# EAGLE board Pro-Mini-Candy-GiantPanel (EAGLE 6.5.0), part 1 of 13
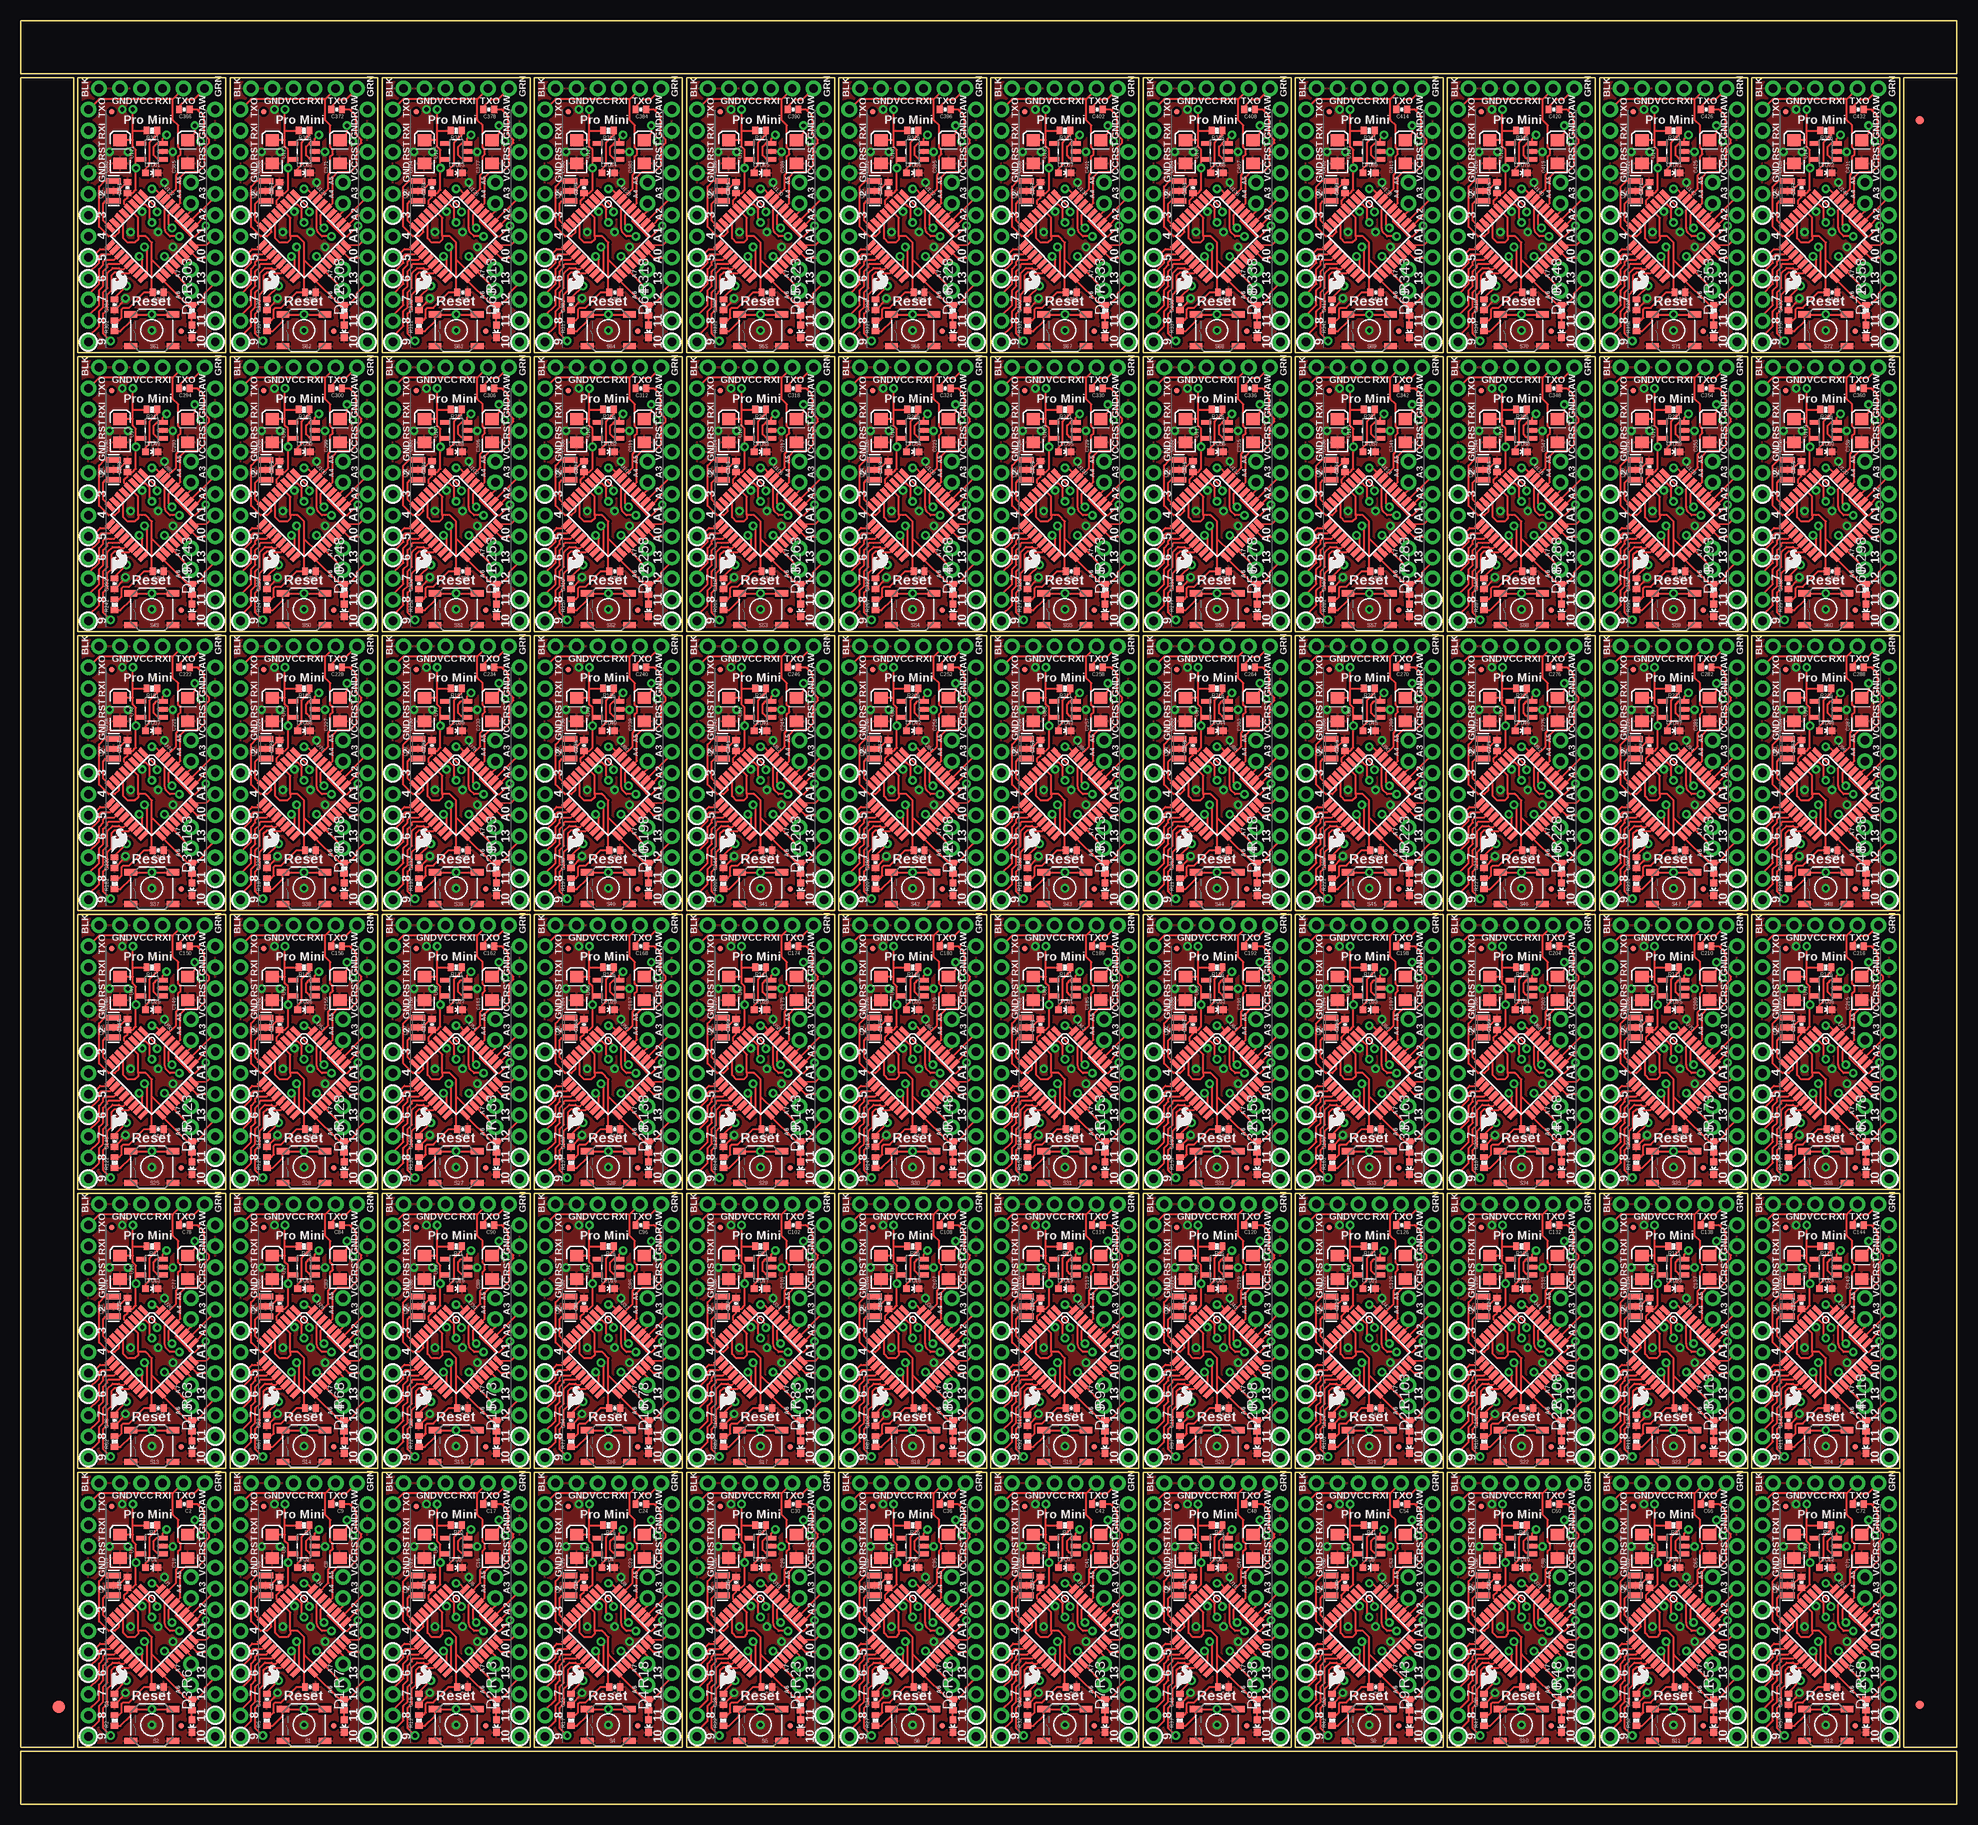
[diagram p0: board, top side]
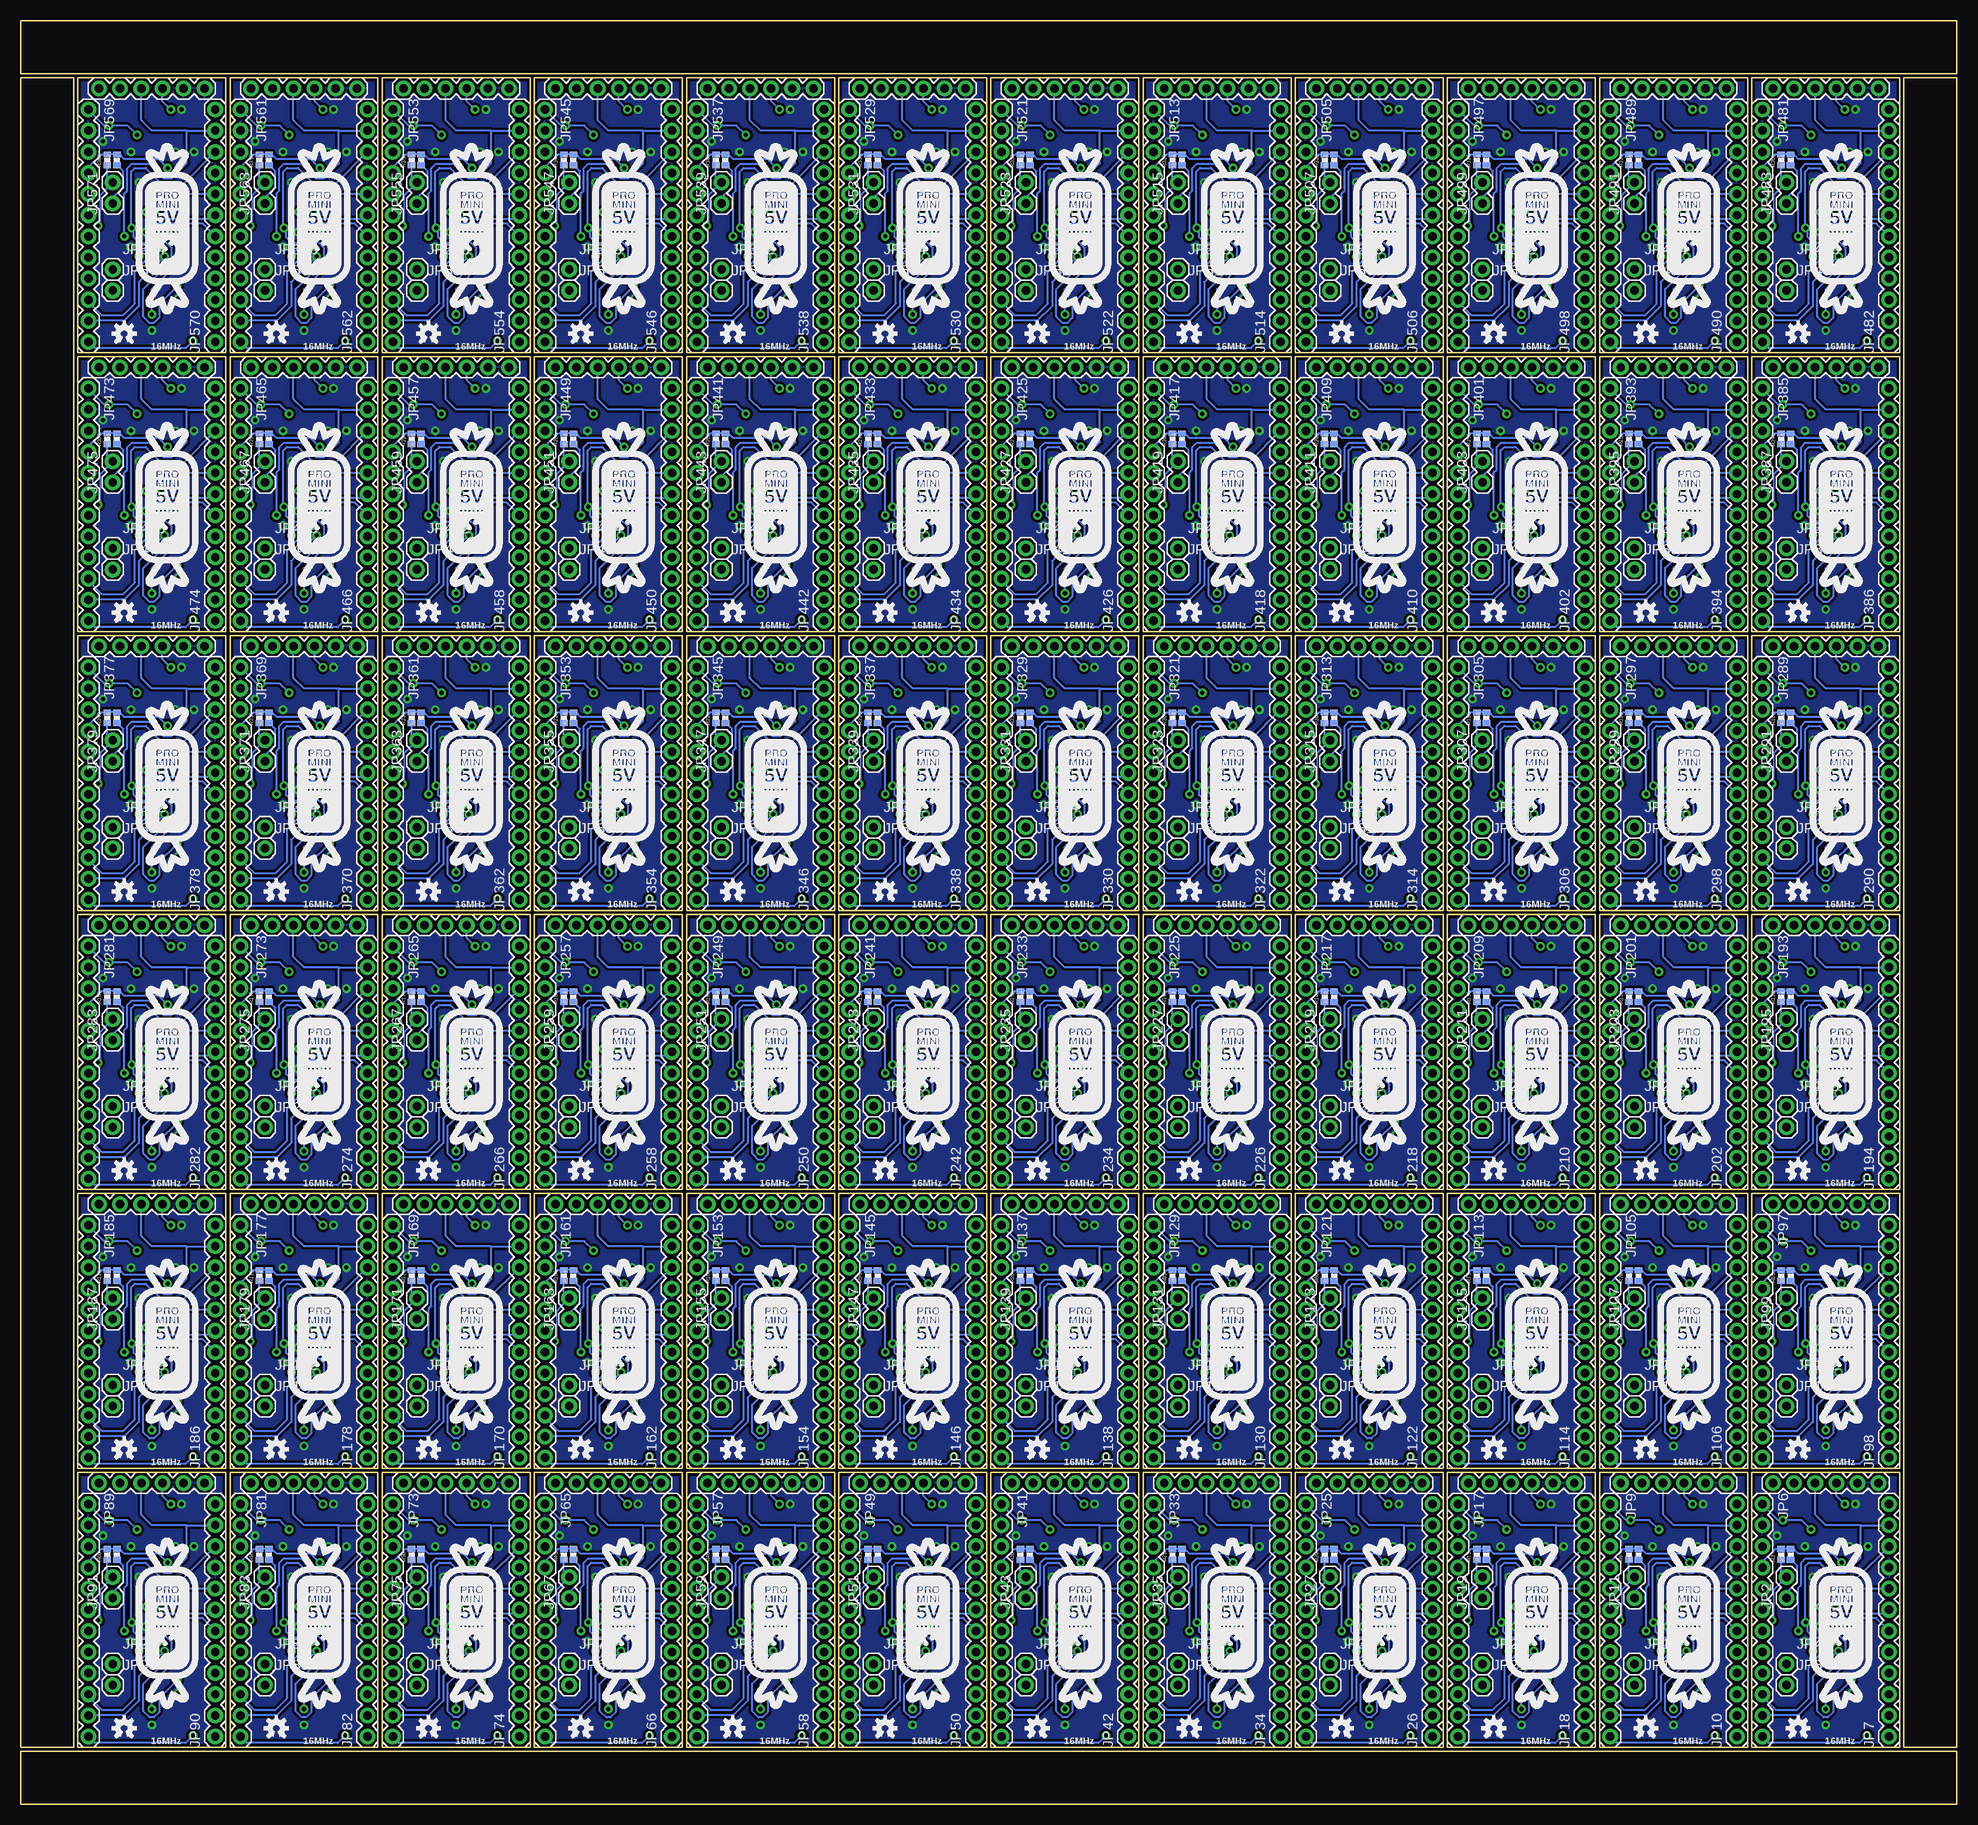
[diagram p1: board, bottom side, seen from below]

Size 232.66 x 214.38 mm. Coordinates in mm from the lower left corner, seen from the top.
Outline: 304 segments
Copper layers (1*16): Top 0.035mm / dielectric 1.5mm / Bottom 0.035mm
Design rules "default": minimum track width 8mil, minimum drill 20mil, track to track 8mil, track to pad 8mil, pad to pad 8mil, via to via 8mil, smd to smd 8mil, copper to edge 8mil, drill to drill 8mil, minimum pad ring 12mil, minimum via ring 10mil, stop-mask expansion 4mil, vias tented up to drill 20mil, thermal gap 10mil
Net classes: 0 default: width 0.203 mm; 1 vcc: width 0.254 mm

## Footprints (pad centres in the part's own frame; a part is rotated, then mirrored left to right if it is on the bottom)
0402-CAP = smd 0.7 x 0.9: 1 -0.65,0; 2 0.65,0
EIA3216 = smd 1.4 x 1.6: A 1.4,0; C -1.4,0
LED-0603 = smd 0.8 x 0.8: A 0,-0.75; C 0,0.75
FIDUCIAL-1.5X3 = smd 1.5 x 1.5: 1 0,0
FIDUCIAL-1X2 = smd 1 x 1: 1 0,0
1X06 = drill 1.016 pad 1.88: 1 0,0; 2 2.54,0; 3 5.08,0; 4 7.62,0; 5 10.16,0; 6 12.7,0
1X02 = drill 1.016 pad 1.88: 1 0,0; 2 2.54,0
1X01 = drill 1.016 pad 1.88: 1 0,0
MICRO-FIDUCIAL = smd 0.635 x 0.635: 1 0,0
1X12 = drill 1.016 pad 1.88: 1 0,0; 2 2.54,0; 3 5.08,0; 4 7.62,0; 5 10.16,0; 6 12.7,0; 7 15.24,0; 8 17.78,0; 9 20.32,0; 10 22.86,0; 11 25.4,0; 12 27.94,0
RESONATOR-SMD = smd 0.7 x 1.7: 1 -1.2,0; 2 0,0; 3 1.2,0
0402-RES = smd 0.7 x 0.9: 1 -0.65,0; 2 0.65,0
TACTILE_SWITCH_SMD = smd 1.524 x 0.762: 1 -2.54,1.905; 2 2.54,1.905; 3 -2.54,-1.905; 4 2.54,-1.905
TQFP32-08 = smd 1.27 x 0.559: 1 -4.293,2.8; 2 -4.293,2; 3 -4.293,1.2; 4 -4.293,0.4; 5 -4.293,-0.4; 6 -4.293,-1.2; 7 -4.293,-2; 8 -4.293,-2.8; 17 4.293,-2.8; 18 4.293,-2; 19 4.293,-1.2; 20 4.293,-0.4; 21 4.293,0.4; 22 4.293,1.2; 23 4.293,2; 24 4.293,2.8 | smd 0.559 x 1.27: 9 -2.8,-4.293; 10 -2,-4.293; 11 -1.2,-4.293; 12 -0.4,-4.293; 13 0.4,-4.293; 14 1.2,-4.293; 15 2,-4.293; 16 2.8,-4.293; 25 2.8,4.293; 26 2,4.293; 27 1.2,4.293; 28 0.4,4.293; 29 -0.4,4.293; 30 -1.2,4.293; 31 -2,4.293; 32 -2.8,4.293
SOT23-5 = smd 0.55 x 1.2: 1 -0.95,-1.3; 2 0,-1.3; 3 0.95,-1.3; 4 0.95,1.3; 5 -0.95,1.3

## Placement (x,y rotation side)
C1  0.1uF  [0402-CAP]  11.28,12.6 90 top
C2  0.1uF  [0402-CAP]  19.66,36.07 180 top
C3  0.1uF  [0402-CAP]  16.51,14.1 180 top
C4  0.1uF  [0402-CAP]  31.11,26.67 90 top
C5  10uF  [EIA3216]  30.23,30.99 90 top
C6  0.1uF  [0402-CAP]  34.8,14.1 180 top
C7  0.1uF  [0402-CAP]  29.57,12.6 90 top
C8  10uF  [EIA3216]  38.35,30.99 90 top
C9  0.1uF  [0402-CAP]  37.95,36.07 180 top
C10  0.1uF  [0402-CAP]  12.83,26.67 90 top
C11  0.1uF  [0402-CAP]  49.4,26.67 90 top
C12  10uF  [EIA3216]  48.51,30.99 90 top
C13  10uF  [EIA3216]  11.94,30.99 90 top
C14  0.1uF  [0402-CAP]  53.09,14.1 180 top
C15  0.1uF  [0402-CAP]  47.85,12.6 90 top
C16  10uF  [EIA3216]  56.64,30.99 90 top
C17  0.1uF  [0402-CAP]  56.24,36.07 180 top
C18  0.1uF  [0402-CAP]  67.69,26.67 90 top
C19  10uF  [EIA3216]  20.07,30.99 90 top
C20  10uF  [EIA3216]  66.8,30.99 90 top
C21  0.1uF  [0402-CAP]  71.37,14.1 180 top
C22  0.1uF  [0402-CAP]  66.14,12.6 90 top
C23  10uF  [EIA3216]  74.93,30.99 90 top
C24  0.1uF  [0402-CAP]  74.52,36.07 180 top
C25  0.1uF  [0402-CAP]  85.98,26.67 90 top
C26  10uF  [EIA3216]  85.09,30.99 90 top
C27  0.1uF  [0402-CAP]  89.66,14.1 180 top
C28  0.1uF  [0402-CAP]  84.43,12.6 90 top
C29  10uF  [EIA3216]  93.22,30.99 90 top
C30  0.1uF  [0402-CAP]  92.81,36.07 180 top
C31  0.1uF  [0402-CAP]  104.27,26.67 90 top
C32  10uF  [EIA3216]  103.38,30.99 90 top
C33  0.1uF  [0402-CAP]  107.95,14.1 180 top
C34  0.1uF  [0402-CAP]  102.72,12.6 90 top
C35  10uF  [EIA3216]  111.51,30.99 90 top
C36  0.1uF  [0402-CAP]  111.1,36.07 180 top
C37  0.1uF  [0402-CAP]  122.56,26.67 90 top
C38  10uF  [EIA3216]  121.67,30.99 90 top
C39  0.1uF  [0402-CAP]  126.24,14.1 180 top
C40  0.1uF  [0402-CAP]  121.01,12.6 90 top
C41  10uF  [EIA3216]  129.79,30.99 90 top
C42  0.1uF  [0402-CAP]  129.39,36.07 180 top
C43  0.1uF  [0402-CAP]  140.84,26.67 90 top
C44  10uF  [EIA3216]  139.95,30.99 90 top
C45  0.1uF  [0402-CAP]  144.53,14.1 180 top
C46  0.1uF  [0402-CAP]  139.29,12.6 90 top
C47  10uF  [EIA3216]  148.08,30.99 90 top
C48  0.1uF  [0402-CAP]  147.68,36.07 180 top
C49  0.1uF  [0402-CAP]  159.13,26.67 90 top
C50  10uF  [EIA3216]  158.24,30.99 90 top
C51  0.1uF  [0402-CAP]  162.81,14.1 180 top
C52  0.1uF  [0402-CAP]  157.58,12.6 90 top
C53  10uF  [EIA3216]  166.37,30.99 90 top
C54  0.1uF  [0402-CAP]  165.96,36.07 180 top
C55  0.1uF  [0402-CAP]  177.42,26.67 90 top
C56  10uF  [EIA3216]  176.53,30.99 90 top
C57  0.1uF  [0402-CAP]  181.1,14.1 180 top
C58  0.1uF  [0402-CAP]  175.87,12.6 90 top
C59  10uF  [EIA3216]  184.66,30.99 90 top
C60  0.1uF  [0402-CAP]  184.25,36.07 180 top
C61  0.1uF  [0402-CAP]  195.71,26.67 90 top
C62  10uF  [EIA3216]  194.82,30.99 90 top
C63  0.1uF  [0402-CAP]  199.39,14.1 180 top
C64  0.1uF  [0402-CAP]  194.16,12.6 90 top
C65  10uF  [EIA3216]  202.95,30.99 90 top
C66  0.1uF  [0402-CAP]  202.54,36.07 180 top
C67  0.1uF  [0402-CAP]  214,26.67 90 top
C68  10uF  [EIA3216]  213.11,30.99 90 top
C69  0.1uF  [0402-CAP]  217.68,14.1 180 top
C70  0.1uF  [0402-CAP]  212.45,12.6 90 top
C71  10uF  [EIA3216]  221.23,30.99 90 top
C72  0.1uF  [0402-CAP]  220.83,36.07 180 top
C73  0.1uF  [0402-CAP]  12.83,60.2 90 top
C74  10uF  [EIA3216]  11.94,64.52 90 top
C75  0.1uF  [0402-CAP]  16.51,47.62 180 top
C76  0.1uF  [0402-CAP]  11.28,46.13 90 top
C77  10uF  [EIA3216]  20.07,64.52 90 top
C78  0.1uF  [0402-CAP]  19.66,69.6 180 top
C79  0.1uF  [0402-CAP]  31.11,60.2 90 top
C80  10uF  [EIA3216]  30.23,64.52 90 top
C81  0.1uF  [0402-CAP]  34.8,47.62 180 top
C82  0.1uF  [0402-CAP]  29.57,46.13 90 top
C83  10uF  [EIA3216]  38.35,64.52 90 top
C84  0.1uF  [0402-CAP]  37.95,69.6 180 top
C85  0.1uF  [0402-CAP]  49.4,60.2 90 top
C86  10uF  [EIA3216]  48.51,64.52 90 top
C87  0.1uF  [0402-CAP]  53.09,47.62 180 top
C88  0.1uF  [0402-CAP]  47.85,46.13 90 top
C89  10uF  [EIA3216]  56.64,64.52 90 top
C90  0.1uF  [0402-CAP]  56.24,69.6 180 top
C91  0.1uF  [0402-CAP]  67.69,60.2 90 top
C92  10uF  [EIA3216]  66.8,64.52 90 top
C93  0.1uF  [0402-CAP]  71.37,47.62 180 top
C94  0.1uF  [0402-CAP]  66.14,46.13 90 top
C95  10uF  [EIA3216]  74.93,64.52 90 top
C96  0.1uF  [0402-CAP]  74.52,69.6 180 top
C97  0.1uF  [0402-CAP]  85.98,60.2 90 top
C98  10uF  [EIA3216]  85.09,64.52 90 top
C99  0.1uF  [0402-CAP]  89.66,47.62 180 top
C100  0.1uF  [0402-CAP]  84.43,46.13 90 top
C101  10uF  [EIA3216]  93.22,64.52 90 top
C102  0.1uF  [0402-CAP]  92.81,69.6 180 top
C103  0.1uF  [0402-CAP]  104.27,60.2 90 top
C104  10uF  [EIA3216]  103.38,64.52 90 top
C105  0.1uF  [0402-CAP]  107.95,47.62 180 top
C106  0.1uF  [0402-CAP]  102.72,46.13 90 top
C107  10uF  [EIA3216]  111.51,64.52 90 top
C108  0.1uF  [0402-CAP]  111.1,69.6 180 top
C109  0.1uF  [0402-CAP]  122.56,60.2 90 top
C110  10uF  [EIA3216]  121.67,64.52 90 top
C111  0.1uF  [0402-CAP]  126.24,47.62 180 top
C112  0.1uF  [0402-CAP]  121.01,46.13 90 top
C113  10uF  [EIA3216]  129.79,64.52 90 top
C114  0.1uF  [0402-CAP]  129.39,69.6 180 top
C115  0.1uF  [0402-CAP]  140.84,60.2 90 top
C116  10uF  [EIA3216]  139.95,64.52 90 top
C117  0.1uF  [0402-CAP]  144.53,47.62 180 top
C118  0.1uF  [0402-CAP]  139.29,46.13 90 top
C119  10uF  [EIA3216]  148.08,64.52 90 top
C120  0.1uF  [0402-CAP]  147.68,69.6 180 top
C121  0.1uF  [0402-CAP]  159.13,60.2 90 top
C122  10uF  [EIA3216]  158.24,64.52 90 top
C123  0.1uF  [0402-CAP]  162.81,47.62 180 top
C124  0.1uF  [0402-CAP]  157.58,46.13 90 top
C125  10uF  [EIA3216]  166.37,64.52 90 top
C126  0.1uF  [0402-CAP]  165.96,69.6 180 top
C127  0.1uF  [0402-CAP]  177.42,60.2 90 top
C128  10uF  [EIA3216]  176.53,64.52 90 top
C129  0.1uF  [0402-CAP]  181.1,47.62 180 top
C130  0.1uF  [0402-CAP]  175.87,46.13 90 top
C131  10uF  [EIA3216]  184.66,64.52 90 top
C132  0.1uF  [0402-CAP]  184.25,69.6 180 top
C133  0.1uF  [0402-CAP]  195.71,60.2 90 top
C134  10uF  [EIA3216]  194.82,64.52 90 top
C135  0.1uF  [0402-CAP]  199.39,47.62 180 top
C136  0.1uF  [0402-CAP]  194.16,46.13 90 top
C137  10uF  [EIA3216]  202.95,64.52 90 top
C138  0.1uF  [0402-CAP]  202.54,69.6 180 top
C139  0.1uF  [0402-CAP]  214,60.2 90 top
C140  10uF  [EIA3216]  213.11,64.52 90 top
C141  0.1uF  [0402-CAP]  217.68,47.62 180 top
C142  0.1uF  [0402-CAP]  212.45,46.13 90 top
C143  10uF  [EIA3216]  221.23,64.52 90 top
C144  0.1uF  [0402-CAP]  220.83,69.6 180 top
C145  0.1uF  [0402-CAP]  12.83,93.73 90 top
C146  10uF  [EIA3216]  11.94,98.04 90 top
C147  0.1uF  [0402-CAP]  16.51,81.15 180 top
C148  0.1uF  [0402-CAP]  11.28,79.65 90 top
C149  10uF  [EIA3216]  20.07,98.04 90 top
C150  0.1uF  [0402-CAP]  19.66,103.12 180 top
C151  0.1uF  [0402-CAP]  31.11,93.73 90 top
C152  10uF  [EIA3216]  30.23,98.04 90 top
C153  0.1uF  [0402-CAP]  34.8,81.15 180 top
C154  0.1uF  [0402-CAP]  29.57,79.65 90 top
C155  10uF  [EIA3216]  38.35,98.04 90 top
C156  0.1uF  [0402-CAP]  37.95,103.12 180 top
C157  0.1uF  [0402-CAP]  49.4,93.73 90 top
C158  10uF  [EIA3216]  48.51,98.04 90 top
C159  0.1uF  [0402-CAP]  53.09,81.15 180 top
C160  0.1uF  [0402-CAP]  47.85,79.65 90 top
C161  10uF  [EIA3216]  56.64,98.04 90 top
C162  0.1uF  [0402-CAP]  56.24,103.12 180 top
C163  0.1uF  [0402-CAP]  67.69,93.73 90 top
C164  10uF  [EIA3216]  66.8,98.04 90 top
C165  0.1uF  [0402-CAP]  71.37,81.15 180 top
C166  0.1uF  [0402-CAP]  66.14,79.65 90 top
C167  10uF  [EIA3216]  74.93,98.04 90 top
C168  0.1uF  [0402-CAP]  74.52,103.12 180 top
C169  0.1uF  [0402-CAP]  85.98,93.73 90 top
C170  10uF  [EIA3216]  85.09,98.04 90 top
C171  0.1uF  [0402-CAP]  89.66,81.15 180 top
C172  0.1uF  [0402-CAP]  84.43,79.65 90 top
C173  10uF  [EIA3216]  93.22,98.04 90 top
C174  0.1uF  [0402-CAP]  92.81,103.12 180 top
C175  0.1uF  [0402-CAP]  104.27,93.73 90 top
C176  10uF  [EIA3216]  103.38,98.04 90 top
C177  0.1uF  [0402-CAP]  107.95,81.15 180 top
C178  0.1uF  [0402-CAP]  102.72,79.65 90 top
C179  10uF  [EIA3216]  111.51,98.04 90 top
C180  0.1uF  [0402-CAP]  111.1,103.12 180 top
C181  0.1uF  [0402-CAP]  122.56,93.73 90 top
C182  10uF  [EIA3216]  121.67,98.04 90 top
C183  0.1uF  [0402-CAP]  126.24,81.15 180 top
C184  0.1uF  [0402-CAP]  121.01,79.65 90 top
C185  10uF  [EIA3216]  129.79,98.04 90 top
C186  0.1uF  [0402-CAP]  129.39,103.12 180 top
C187  0.1uF  [0402-CAP]  140.84,93.73 90 top
C188  10uF  [EIA3216]  139.95,98.04 90 top
C189  0.1uF  [0402-CAP]  144.53,81.15 180 top
C190  0.1uF  [0402-CAP]  139.29,79.65 90 top
C191  10uF  [EIA3216]  148.08,98.04 90 top
C192  0.1uF  [0402-CAP]  147.68,103.12 180 top
C193  0.1uF  [0402-CAP]  159.13,93.73 90 top
C194  10uF  [EIA3216]  158.24,98.04 90 top
C195  0.1uF  [0402-CAP]  162.81,81.15 180 top
C196  0.1uF  [0402-CAP]  157.58,79.65 90 top
C197  10uF  [EIA3216]  166.37,98.04 90 top
C198  0.1uF  [0402-CAP]  165.96,103.12 180 top
C199  0.1uF  [0402-CAP]  177.42,93.73 90 top
C200  10uF  [EIA3216]  176.53,98.04 90 top
C201  0.1uF  [0402-CAP]  181.1,81.15 180 top
C202  0.1uF  [0402-CAP]  175.87,79.65 90 top
C203  10uF  [EIA3216]  184.66,98.04 90 top
C204  0.1uF  [0402-CAP]  184.25,103.12 180 top
C205  0.1uF  [0402-CAP]  195.71,93.73 90 top
C206  10uF  [EIA3216]  194.82,98.04 90 top
C207  0.1uF  [0402-CAP]  199.39,81.15 180 top
C208  0.1uF  [0402-CAP]  194.16,79.65 90 top
C209  10uF  [EIA3216]  202.95,98.04 90 top
C210  0.1uF  [0402-CAP]  202.54,103.12 180 top
C211  0.1uF  [0402-CAP]  214,93.73 90 top
C212  10uF  [EIA3216]  213.11,98.04 90 top
C213  0.1uF  [0402-CAP]  217.68,81.15 180 top
C214  0.1uF  [0402-CAP]  212.45,79.65 90 top
C215  10uF  [EIA3216]  221.23,98.04 90 top
C216  0.1uF  [0402-CAP]  220.83,103.12 180 top
C217  0.1uF  [0402-CAP]  12.83,127.25 90 top
C218  10uF  [EIA3216]  11.94,131.57 90 top
C219  0.1uF  [0402-CAP]  16.51,114.68 180 top
C220  0.1uF  [0402-CAP]  11.28,113.18 90 top
C221  10uF  [EIA3216]  20.07,131.57 90 top
C222  0.1uF  [0402-CAP]  19.66,136.65 180 top
C223  0.1uF  [0402-CAP]  31.11,127.25 90 top
C224  10uF  [EIA3216]  30.23,131.57 90 top
C225  0.1uF  [0402-CAP]  34.8,114.68 180 top
C226  0.1uF  [0402-CAP]  29.57,113.18 90 top
C227  10uF  [EIA3216]  38.35,131.57 90 top
C228  0.1uF  [0402-CAP]  37.95,136.65 180 top
C229  0.1uF  [0402-CAP]  49.4,127.25 90 top
C230  10uF  [EIA3216]  48.51,131.57 90 top
C231  0.1uF  [0402-CAP]  53.09,114.68 180 top
C232  0.1uF  [0402-CAP]  47.85,113.18 90 top
C233  10uF  [EIA3216]  56.64,131.57 90 top
C234  0.1uF  [0402-CAP]  56.24,136.65 180 top
C235  0.1uF  [0402-CAP]  67.69,127.25 90 top
C236  10uF  [EIA3216]  66.8,131.57 90 top
C237  0.1uF  [0402-CAP]  71.37,114.68 180 top
C238  0.1uF  [0402-CAP]  66.14,113.18 90 top
C239  10uF  [EIA3216]  74.93,131.57 90 top
C240  0.1uF  [0402-CAP]  74.52,136.65 180 top
C241  0.1uF  [0402-CAP]  85.98,127.25 90 top
C242  10uF  [EIA3216]  85.09,131.57 90 top
C243  0.1uF  [0402-CAP]  89.66,114.68 180 top
C244  0.1uF  [0402-CAP]  84.43,113.18 90 top
C245  10uF  [EIA3216]  93.22,131.57 90 top
C246  0.1uF  [0402-CAP]  92.81,136.65 180 top
C247  0.1uF  [0402-CAP]  104.27,127.25 90 top
C248  10uF  [EIA3216]  103.38,131.57 90 top
C249  0.1uF  [0402-CAP]  107.95,114.68 180 top
C250  0.1uF  [0402-CAP]  102.72,113.18 90 top
C251  10uF  [EIA3216]  111.51,131.57 90 top
C252  0.1uF  [0402-CAP]  111.1,136.65 180 top
C253  0.1uF  [0402-CAP]  122.56,127.25 90 top
C254  10uF  [EIA3216]  121.67,131.57 90 top
C255  0.1uF  [0402-CAP]  126.24,114.68 180 top
C256  0.1uF  [0402-CAP]  121.01,113.18 90 top
C257  10uF  [EIA3216]  129.79,131.57 90 top
C258  0.1uF  [0402-CAP]  129.39,136.65 180 top
C259  0.1uF  [0402-CAP]  140.84,127.25 90 top
C260  10uF  [EIA3216]  139.95,131.57 90 top
C261  0.1uF  [0402-CAP]  144.53,114.68 180 top
C262  0.1uF  [0402-CAP]  139.29,113.18 90 top
C263  10uF  [EIA3216]  148.08,131.57 90 top
C264  0.1uF  [0402-CAP]  147.68,136.65 180 top
C265  0.1uF  [0402-CAP]  159.13,127.25 90 top
C266  10uF  [EIA3216]  158.24,131.57 90 top
C267  0.1uF  [0402-CAP]  162.81,114.68 180 top
C268  0.1uF  [0402-CAP]  157.58,113.18 90 top
C269  10uF  [EIA3216]  166.37,131.57 90 top
C270  0.1uF  [0402-CAP]  165.96,136.65 180 top
C271  0.1uF  [0402-CAP]  177.42,127.25 90 top
C272  10uF  [EIA3216]  176.53,131.57 90 top
C273  0.1uF  [0402-CAP]  181.1,114.68 180 top
C274  0.1uF  [0402-CAP]  175.87,113.18 90 top
C275  10uF  [EIA3216]  184.66,131.57 90 top
C276  0.1uF  [0402-CAP]  184.25,136.65 180 top
C277  0.1uF  [0402-CAP]  195.71,127.25 90 top
C278  10uF  [EIA3216]  194.82,131.57 90 top
C279  0.1uF  [0402-CAP]  199.39,114.68 180 top
C280  0.1uF  [0402-CAP]  194.16,113.18 90 top
C281  10uF  [EIA3216]  202.95,131.57 90 top
C282  0.1uF  [0402-CAP]  202.54,136.65 180 top
C283  0.1uF  [0402-CAP]  214,127.25 90 top
C284  10uF  [EIA3216]  213.11,131.57 90 top
C285  0.1uF  [0402-CAP]  217.68,114.68 180 top
C286  0.1uF  [0402-CAP]  212.45,113.18 90 top
C287  10uF  [EIA3216]  221.23,131.57 90 top
C288  0.1uF  [0402-CAP]  220.83,136.65 180 top
C289  0.1uF  [0402-CAP]  12.83,160.78 90 top
C290  10uF  [EIA3216]  11.94,165.1 90 top
C291  0.1uF  [0402-CAP]  16.51,148.21 180 top
C292  0.1uF  [0402-CAP]  11.28,146.71 90 top
C293  10uF  [EIA3216]  20.07,165.1 90 top
C294  0.1uF  [0402-CAP]  19.66,170.18 180 top
C295  0.1uF  [0402-CAP]  31.11,160.78 90 top
C296  10uF  [EIA3216]  30.23,165.1 90 top
C297  0.1uF  [0402-CAP]  34.8,148.21 180 top
C298  0.1uF  [0402-CAP]  29.57,146.71 90 top
C299  10uF  [EIA3216]  38.35,165.1 90 top
C300  0.1uF  [0402-CAP]  37.95,170.18 180 top
C301  0.1uF  [0402-CAP]  49.4,160.78 90 top
C302  10uF  [EIA3216]  48.51,165.1 90 top
C303  0.1uF  [0402-CAP]  53.09,148.21 180 top
C304  0.1uF  [0402-CAP]  47.85,146.71 90 top
C305  10uF  [EIA3216]  56.64,165.1 90 top
C306  0.1uF  [0402-CAP]  56.24,170.18 180 top
C307  0.1uF  [0402-CAP]  67.69,160.78 90 top
C308  10uF  [EIA3216]  66.8,165.1 90 top
C309  0.1uF  [0402-CAP]  71.37,148.21 180 top
C310  0.1uF  [0402-CAP]  66.14,146.71 90 top
C311  10uF  [EIA3216]  74.93,165.1 90 top
C312  0.1uF  [0402-CAP]  74.52,170.18 180 top
C313  0.1uF  [0402-CAP]  85.98,160.78 90 top
C314  10uF  [EIA3216]  85.09,165.1 90 top
C315  0.1uF  [0402-CAP]  89.66,148.21 180 top
C316  0.1uF  [0402-CAP]  84.43,146.71 90 top
C317  10uF  [EIA3216]  93.22,165.1 90 top
C318  0.1uF  [0402-CAP]  92.81,170.18 180 top
C319  0.1uF  [0402-CAP]  104.27,160.78 90 top
C320  10uF  [EIA3216]  103.38,165.1 90 top
C321  0.1uF  [0402-CAP]  107.95,148.21 180 top
C322  0.1uF  [0402-CAP]  102.72,146.71 90 top
C323  10uF  [EIA3216]  111.51,165.1 90 top
C324  0.1uF  [0402-CAP]  111.1,170.18 180 top
C325  0.1uF  [0402-CAP]  122.56,160.78 90 top
C326  10uF  [EIA3216]  121.67,165.1 90 top
C327  0.1uF  [0402-CAP]  126.24,148.21 180 top
C328  0.1uF  [0402-CAP]  121.01,146.71 90 top
C329  10uF  [EIA3216]  129.79,165.1 90 top
C330  0.1uF  [0402-CAP]  129.39,170.18 180 top
C331  0.1uF  [0402-CAP]  140.84,160.78 90 top
C332  10uF  [EIA3216]  139.95,165.1 90 top
C333  0.1uF  [0402-CAP]  144.53,148.21 180 top
C334  0.1uF  [0402-CAP]  139.29,146.71 90 top
C335  10uF  [EIA3216]  148.08,165.1 90 top
C336  0.1uF  [0402-CAP]  147.68,170.18 180 top
C337  0.1uF  [0402-CAP]  159.13,160.78 90 top
C338  10uF  [EIA3216]  158.24,165.1 90 top
C339  0.1uF  [0402-CAP]  162.81,148.21 180 top
C340  0.1uF  [0402-CAP]  157.58,146.71 90 top
C341  10uF  [EIA3216]  166.37,165.1 90 top
C342  0.1uF  [0402-CAP]  165.96,170.18 180 top
C343  0.1uF  [0402-CAP]  177.42,160.78 90 top
C344  10uF  [EIA3216]  176.53,165.1 90 top
C345  0.1uF  [0402-CAP]  181.1,148.21 180 top
C346  0.1uF  [0402-CAP]  175.87,146.71 90 top
C347  10uF  [EIA3216]  184.66,165.1 90 top
C348  0.1uF  [0402-CAP]  184.25,170.18 180 top
C349  0.1uF  [0402-CAP]  195.71,160.78 90 top
C350  10uF  [EIA3216]  194.82,165.1 90 top
C351  0.1uF  [0402-CAP]  199.39,148.21 180 top
C352  0.1uF  [0402-CAP]  194.16,146.71 90 top
C353  10uF  [EIA3216]  202.95,165.1 90 top
C354  0.1uF  [0402-CAP]  202.54,170.18 180 top
C355  0.1uF  [0402-CAP]  214,160.78 90 top
C356  10uF  [EIA3216]  213.11,165.1 90 top
C357  0.1uF  [0402-CAP]  217.68,148.21 180 top
C358  0.1uF  [0402-CAP]  212.45,146.71 90 top
C359  10uF  [EIA3216]  221.23,165.1 90 top
C360  0.1uF  [0402-CAP]  220.83,170.18 180 top
C361  0.1uF  [0402-CAP]  12.83,194.31 90 top
C362  10uF  [EIA3216]  11.94,198.63 90 top
C363  0.1uF  [0402-CAP]  16.51,181.74 180 top
C364  0.1uF  [0402-CAP]  11.28,180.24 90 top
C365  10uF  [EIA3216]  20.07,198.63 90 top
C366  0.1uF  [0402-CAP]  19.66,203.71 180 top
C367  0.1uF  [0402-CAP]  31.11,194.31 90 top
C368  10uF  [EIA3216]  30.23,198.63 90 top
C369  0.1uF  [0402-CAP]  34.8,181.74 180 top
C370  0.1uF  [0402-CAP]  29.57,180.24 90 top
C371  10uF  [EIA3216]  38.35,198.63 90 top
C372  0.1uF  [0402-CAP]  37.95,203.71 180 top
C373  0.1uF  [0402-CAP]  49.4,194.31 90 top
C374  10uF  [EIA3216]  48.51,198.63 90 top
C375  0.1uF  [0402-CAP]  53.09,181.74 180 top
C376  0.1uF  [0402-CAP]  47.85,180.24 90 top
C377  10uF  [EIA3216]  56.64,198.63 90 top
C378  0.1uF  [0402-CAP]  56.24,203.71 180 top
C379  0.1uF  [0402-CAP]  67.69,194.31 90 top
C380  10uF  [EIA3216]  66.8,198.63 90 top
C381  0.1uF  [0402-CAP]  71.37,181.74 180 top
C382  0.1uF  [0402-CAP]  66.14,180.24 90 top
C383  10uF  [EIA3216]  74.93,198.63 90 top
C384  0.1uF  [0402-CAP]  74.52,203.71 180 top
C385  0.1uF  [0402-CAP]  85.98,194.31 90 top
C386  10uF  [EIA3216]  85.09,198.63 90 top
C387  0.1uF  [0402-CAP]  89.66,181.74 180 top
C388  0.1uF  [0402-CAP]  84.43,180.24 90 top
C389  10uF  [EIA3216]  93.22,198.63 90 top
C390  0.1uF  [0402-CAP]  92.81,203.71 180 top
C391  0.1uF  [0402-CAP]  104.27,194.31 90 top
C392  10uF  [EIA3216]  103.38,198.63 90 top
C393  0.1uF  [0402-CAP]  107.95,181.74 180 top
C394  0.1uF  [0402-CAP]  102.72,180.24 90 top
C395  10uF  [EIA3216]  111.51,198.63 90 top
C396  0.1uF  [0402-CAP]  111.1,203.71 180 top
C397  0.1uF  [0402-CAP]  122.56,194.31 90 top
C398  10uF  [EIA3216]  121.67,198.63 90 top
C399  0.1uF  [0402-CAP]  126.24,181.74 180 top
C400  0.1uF  [0402-CAP]  121.01,180.24 90 top
C401  10uF  [EIA3216]  129.79,198.63 90 top
C402  0.1uF  [0402-CAP]  129.39,203.71 180 top
C403  0.1uF  [0402-CAP]  140.84,194.31 90 top
C404  10uF  [EIA3216]  139.95,198.63 90 top
C405  0.1uF  [0402-CAP]  144.53,181.74 180 top
C406  0.1uF  [0402-CAP]  139.29,180.24 90 top
C407  10uF  [EIA3216]  148.08,198.63 90 top
C408  0.1uF  [0402-CAP]  147.68,203.71 180 top
C409  0.1uF  [0402-CAP]  159.13,194.31 90 top
C410  10uF  [EIA3216]  158.24,198.63 90 top
C411  0.1uF  [0402-CAP]  162.81,181.74 180 top
C412  0.1uF  [0402-CAP]  157.58,180.24 90 top
C413  10uF  [EIA3216]  166.37,198.63 90 top
C414  0.1uF  [0402-CAP]  165.96,203.71 180 top
C415  0.1uF  [0402-CAP]  177.42,194.31 90 top
C416  10uF  [EIA3216]  176.53,198.63 90 top
C417  0.1uF  [0402-CAP]  181.1,181.74 180 top
C418  0.1uF  [0402-CAP]  175.87,180.24 90 top
C419  10uF  [EIA3216]  184.66,198.63 90 top
C420  0.1uF  [0402-CAP]  184.25,203.71 180 top
C421  0.1uF  [0402-CAP]  195.71,194.31 90 top
C422  10uF  [EIA3216]  194.82,198.63 90 top
C423  0.1uF  [0402-CAP]  199.39,181.74 180 top
C424  0.1uF  [0402-CAP]  194.16,180.24 90 top
C425  10uF  [EIA3216]  202.95,198.63 90 top
C426  0.1uF  [0402-CAP]  202.54,203.71 180 top
C427  0.1uF  [0402-CAP]  214,194.31 90 top
C428  10uF  [EIA3216]  213.11,198.63 90 top
C429  0.1uF  [0402-CAP]  217.68,181.74 180 top
C430  0.1uF  [0402-CAP]  212.45,180.24 90 top
C431  10uF  [EIA3216]  221.23,198.63 90 top
C432  0.1uF  [0402-CAP]  220.83,203.71 180 top
D1  Green  [LED-0603]  38.86,9.4 180 top
D2  Green  [LED-0603]  57.15,9.4 180 top
D3  Green  [LED-0603]  20.57,9.4 180 top
D4  Green  [LED-0603]  75.44,9.4 180 top
D5  Green  [LED-0603]  93.73,9.4 180 top
D6  Green  [LED-0603]  112.01,9.4 180 top
D7  Green  [LED-0603]  130.3,9.4 180 top
D8  Green  [LED-0603]  148.59,9.4 180 top
D9  Green  [LED-0603]  166.88,9.4 180 top
D10  Green  [LED-0603]  185.17,9.4 180 top
D11  Green  [LED-0603]  203.45,9.4 180 top
D12  Green  [LED-0603]  221.74,9.4 180 top
D13  Green  [LED-0603]  20.57,42.93 180 top
D14  Green  [LED-0603]  38.86,42.93 180 top
D15  Green  [LED-0603]  57.15,42.93 180 top
D16  Green  [LED-0603]  75.44,42.93 180 top
D17  Green  [LED-0603]  93.73,42.93 180 top
D18  Green  [LED-0603]  112.01,42.93 180 top
D19  Green  [LED-0603]  130.3,42.93 180 top
D20  Green  [LED-0603]  148.59,42.93 180 top
D21  Green  [LED-0603]  166.88,42.93 180 top
D22  Green  [LED-0603]  185.17,42.93 180 top
D23  Green  [LED-0603]  203.45,42.93 180 top
D24  Green  [LED-0603]  221.74,42.93 180 top
D25  Green  [LED-0603]  20.57,76.45 180 top
D26  Green  [LED-0603]  38.86,76.45 180 top
D27  Green  [LED-0603]  57.15,76.45 180 top
D28  Green  [LED-0603]  75.44,76.45 180 top
D29  Green  [LED-0603]  93.73,76.45 180 top
D30  Green  [LED-0603]  112.01,76.45 180 top
D31  Green  [LED-0603]  130.3,76.45 180 top
D32  Green  [LED-0603]  148.59,76.45 180 top
D33  Green  [LED-0603]  166.88,76.45 180 top
D34  Green  [LED-0603]  185.17,76.45 180 top
D35  Green  [LED-0603]  203.45,76.45 180 top
D36  Green  [LED-0603]  221.74,76.45 180 top
D37  Green  [LED-0603]  20.57,109.98 180 top
D38  Green  [LED-0603]  38.86,109.98 180 top
D39  Green  [LED-0603]  57.15,109.98 180 top
D40  Green  [LED-0603]  75.44,109.98 180 top
D41  Green  [LED-0603]  93.73,109.98 180 top
D42  Green  [LED-0603]  112.01,109.98 180 top
D43  Green  [LED-0603]  130.3,109.98 180 top
D44  Green  [LED-0603]  148.59,109.98 180 top
D45  Green  [LED-0603]  166.88,109.98 180 top
D46  Green  [LED-0603]  185.17,109.98 180 top
D47  Green  [LED-0603]  203.45,109.98 180 top
D48  Green  [LED-0603]  221.74,109.98 180 top
D49  Green  [LED-0603]  20.57,143.51 180 top
D50  Green  [LED-0603]  38.86,143.51 180 top
D51  Green  [LED-0603]  57.15,143.51 180 top
D52  Green  [LED-0603]  75.44,143.51 180 top
D53  Green  [LED-0603]  93.73,143.51 180 top
D54  Green  [LED-0603]  112.01,143.51 180 top
D55  Green  [LED-0603]  130.3,143.51 180 top
D56  Green  [LED-0603]  148.59,143.51 180 top
D57  Green  [LED-0603]  166.88,143.51 180 top
D58  Green  [LED-0603]  185.17,143.51 180 top
D59  Green  [LED-0603]  203.45,143.51 180 top
D60  Green  [LED-0603]  221.74,143.51 180 top
D61  Green  [LED-0603]  20.57,177.04 180 top
D62  Green  [LED-0603]  38.86,177.04 180 top
D63  Green  [LED-0603]  57.15,177.04 180 top
D64  Green  [LED-0603]  75.44,177.04 180 top
D65  Green  [LED-0603]  93.73,177.04 180 top
D66  Green  [LED-0603]  112.01,177.04 180 top
D67  Green  [LED-0603]  130.3,177.04 180 top
D68  Green  [LED-0603]  148.59,177.04 180 top
D69  Green  [LED-0603]  166.88,177.04 180 top
D70  Green  [LED-0603]  185.17,177.04 180 top
D71  Green  [LED-0603]  203.45,177.04 180 top
D72  Green  [LED-0603]  221.74,177.04 180 top
E$1  [FIDUCIAL-1.5X3]  4.57,11.68 0 top
E$4  [FIDUCIAL-1X2]  228.22,11.94 0 top
E$5  [FIDUCIAL-1X2]  228.22,202.44 180 top
JP1  FTDI Basic  [1X06]  22.1,38.61 0 bottom
JP2  [1X02]  20.45,24.77 90 bottom
JP3  [1X01]  20.45,14.3 0 bottom
JP4  [1X01]  20.45,16.84 0 bottom
JP5  FIDUCIALUFIDUCIAL  [MICRO-FIDUCIAL]  10.92,35.81 0 top
JP6  [1X12]  23.37,36.07 270 bottom
JP7  [1X12]  8.13,8.13 90 bottom
JP8  FIDUCIALUFIDUCIAL  [MICRO-FIDUCIAL]  19.3,9.4 180 top
JP9  [1X12]  41.66,36.07 270 bottom
JP10  [1X12]  26.42,8.13 90 bottom
JP11  [1X02]  38.73,24.77 90 bottom
JP12  FTDI Basic  [1X06]  40.39,38.61 0 bottom
JP13  [1X01]  38.73,14.3 0 bottom
JP14  [1X01]  38.73,16.84 0 bottom
JP15  FIDUCIALUFIDUCIAL  [MICRO-FIDUCIAL]  29.21,35.81 0 top
JP16  FIDUCIALUFIDUCIAL  [MICRO-FIDUCIAL]  37.59,9.4 180 top
JP17  [1X12]  59.94,36.07 270 bottom
JP18  [1X12]  44.7,8.13 90 bottom
JP19  [1X02]  57.02,24.77 90 bottom
JP20  FTDI Basic  [1X06]  58.67,38.61 0 bottom
JP21  [1X01]  57.02,14.3 0 bottom
JP22  [1X01]  57.02,16.84 0 bottom
JP23  FIDUCIALUFIDUCIAL  [MICRO-FIDUCIAL]  47.5,35.81 0 top
JP24  FIDUCIALUFIDUCIAL  [MICRO-FIDUCIAL]  55.88,9.4 180 top
JP25  [1X12]  78.23,36.07 270 bottom
JP26  [1X12]  62.99,8.13 90 bottom
JP27  [1X02]  75.31,24.77 90 bottom
JP28  FTDI Basic  [1X06]  76.96,38.61 0 bottom
JP29  [1X01]  75.31,14.3 0 bottom
JP30  [1X01]  75.31,16.84 0 bottom
JP31  FIDUCIALUFIDUCIAL  [MICRO-FIDUCIAL]  65.79,35.81 0 top
JP32  FIDUCIALUFIDUCIAL  [MICRO-FIDUCIAL]  74.17,9.4 180 top
JP33  [1X12]  96.52,36.07 270 bottom
JP34  [1X12]  81.28,8.13 90 bottom
JP35  [1X02]  93.6,24.77 90 bottom
JP36  FTDI Basic  [1X06]  95.25,38.61 0 bottom
JP37  [1X01]  93.6,14.3 0 bottom
JP38  [1X01]  93.6,16.84 0 bottom
JP39  FIDUCIALUFIDUCIAL  [MICRO-FIDUCIAL]  84.07,35.81 0 top
JP40  FIDUCIALUFIDUCIAL  [MICRO-FIDUCIAL]  92.46,9.4 180 top
JP41  [1X12]  114.81,36.07 270 bottom
JP42  [1X12]  99.57,8.13 90 bottom
JP43  [1X02]  111.89,24.77 90 bottom
JP44  FTDI Basic  [1X06]  113.54,38.61 0 bottom
JP45  [1X01]  111.89,14.3 0 bottom
JP46  [1X01]  111.89,16.84 0 bottom
JP47  FIDUCIALUFIDUCIAL  [MICRO-FIDUCIAL]  102.36,35.81 0 top
JP48  FIDUCIALUFIDUCIAL  [MICRO-FIDUCIAL]  110.74,9.4 180 top
JP49  [1X12]  133.1,36.07 270 bottom
JP50  [1X12]  117.86,8.13 90 bottom
JP51  [1X02]  130.18,24.77 90 bottom
JP52  FTDI Basic  [1X06]  131.83,38.61 0 bottom
JP53  [1X01]  130.18,14.3 0 bottom
JP54  [1X01]  130.18,16.84 0 bottom
JP55  FIDUCIALUFIDUCIAL  [MICRO-FIDUCIAL]  120.65,35.81 0 top
JP56  FIDUCIALUFIDUCIAL  [MICRO-FIDUCIAL]  129.03,9.4 180 top
JP57  [1X12]  151.38,36.07 270 bottom
JP58  [1X12]  136.14,8.13 90 bottom
JP59  [1X02]  148.46,24.77 90 bottom
JP60  FTDI Basic  [1X06]  150.11,38.61 0 bottom
JP61  [1X01]  148.46,14.3 0 bottom
JP62  [1X01]  148.46,16.84 0 bottom
JP63  FIDUCIALUFIDUCIAL  [MICRO-FIDUCIAL]  138.94,35.81 0 top
JP64  FIDUCIALUFIDUCIAL  [MICRO-FIDUCIAL]  147.32,9.4 180 top
JP65  [1X12]  169.67,36.07 270 bottom
JP66  [1X12]  154.43,8.13 90 bottom
JP67  [1X02]  166.75,24.77 90 bottom
JP68  FTDI Basic  [1X06]  168.4,38.61 0 bottom
JP69  [1X01]  166.75,14.3 0 bottom
JP70  [1X01]  166.75,16.84 0 bottom
JP71  FIDUCIALUFIDUCIAL  [MICRO-FIDUCIAL]  157.23,35.81 0 top
JP72  FIDUCIALUFIDUCIAL  [MICRO-FIDUCIAL]  165.61,9.4 180 top
JP73  [1X12]  187.96,36.07 270 bottom
JP74  [1X12]  172.72,8.13 90 bottom
JP75  [1X02]  185.04,24.77 90 bottom
JP76  FTDI Basic  [1X06]  186.69,38.61 0 bottom
JP77  [1X01]  185.04,14.3 0 bottom
JP78  [1X01]  185.04,16.84 0 bottom
JP79  FIDUCIALUFIDUCIAL  [MICRO-FIDUCIAL]  175.51,35.81 0 top
JP80  FIDUCIALUFIDUCIAL  [MICRO-FIDUCIAL]  183.9,9.4 180 top
JP81  [1X12]  206.25,36.07 270 bottom
JP82  [1X12]  191.01,8.13 90 bottom
JP83  [1X02]  203.33,24.77 90 bottom
JP84  FTDI Basic  [1X06]  204.98,38.61 0 bottom
JP85  [1X01]  203.33,14.3 0 bottom
JP86  [1X01]  203.33,16.84 0 bottom
JP87  FIDUCIALUFIDUCIAL  [MICRO-FIDUCIAL]  193.8,35.81 0 top
JP88  FIDUCIALUFIDUCIAL  [MICRO-FIDUCIAL]  202.18,9.4 180 top
JP89  [1X12]  224.54,36.07 270 bottom
JP90  [1X12]  209.3,8.13 90 bottom
JP91  [1X02]  221.62,24.77 90 bottom
JP92  FTDI Basic  [1X06]  223.27,38.61 0 bottom
JP93  [1X01]  221.62,14.3 0 bottom
JP94  [1X01]  221.62,16.84 0 bottom
JP95  FIDUCIALUFIDUCIAL  [MICRO-FIDUCIAL]  212.09,35.81 0 top
JP96  FIDUCIALUFIDUCIAL  [MICRO-FIDUCIAL]  220.47,9.4 180 top
JP97  [1X12]  23.37,69.6 270 bottom
JP98  [1X12]  8.13,41.66 90 bottom
JP99  [1X02]  20.45,58.29 90 bottom
JP100  FTDI Basic  [1X06]  22.1,72.14 0 bottom
JP101  [1X01]  20.45,47.83 0 bottom
JP102  [1X01]  20.45,50.37 0 bottom
JP103  FIDUCIALUFIDUCIAL  [MICRO-FIDUCIAL]  10.92,69.34 0 top
JP104  FIDUCIALUFIDUCIAL  [MICRO-FIDUCIAL]  19.3,42.93 180 top
JP105  [1X12]  41.66,69.6 270 bottom
JP106  [1X12]  26.42,41.66 90 bottom
JP107  [1X02]  38.73,58.29 90 bottom
JP108  FTDI Basic  [1X06]  40.39,72.14 0 bottom
JP109  [1X01]  38.73,47.83 0 bottom
JP110  [1X01]  38.73,50.37 0 bottom
JP111  FIDUCIALUFIDUCIAL  [MICRO-FIDUCIAL]  29.21,69.34 0 top
JP112  FIDUCIALUFIDUCIAL  [MICRO-FIDUCIAL]  37.59,42.93 180 top
JP113  [1X12]  59.94,69.6 270 bottom
JP114  [1X12]  44.7,41.66 90 bottom
JP115  [1X02]  57.02,58.29 90 bottom
JP116  FTDI Basic  [1X06]  58.67,72.14 0 bottom
JP117  [1X01]  57.02,47.83 0 bottom
JP118  [1X01]  57.02,50.37 0 bottom
JP119  FIDUCIALUFIDUCIAL  [MICRO-FIDUCIAL]  47.5,69.34 0 top
JP120  FIDUCIALUFIDUCIAL  [MICRO-FIDUCIAL]  55.88,42.93 180 top
JP121  [1X12]  78.23,69.6 270 bottom
JP122  [1X12]  62.99,41.66 90 bottom
JP123  [1X02]  75.31,58.29 90 bottom
JP124  FTDI Basic  [1X06]  76.96,72.14 0 bottom
JP125  [1X01]  75.31,47.83 0 bottom
JP126  [1X01]  75.31,50.37 0 bottom
JP127  FIDUCIALUFIDUCIAL  [MICRO-FIDUCIAL]  65.79,69.34 0 top
JP128  FIDUCIALUFIDUCIAL  [MICRO-FIDUCIAL]  74.17,42.93 180 top
JP129  [1X12]  96.52,69.6 270 bottom
JP130  [1X12]  81.28,41.66 90 bottom
JP131  [1X02]  93.6,58.29 90 bottom
JP132  FTDI Basic  [1X06]  95.25,72.14 0 bottom
JP133  [1X01]  93.6,47.83 0 bottom
JP134  [1X01]  93.6,50.37 0 bottom
JP135  FIDUCIALUFIDUCIAL  [MICRO-FIDUCIAL]  84.07,69.34 0 top
JP136  FIDUCIALUFIDUCIAL  [MICRO-FIDUCIAL]  92.46,42.93 180 top
JP137  [1X12]  114.81,69.6 270 bottom
JP138  [1X12]  99.57,41.66 90 bottom
JP139  [1X02]  111.89,58.29 90 bottom
JP140  FTDI Basic  [1X06]  113.54,72.14 0 bottom
JP141  [1X01]  111.89,47.83 0 bottom
JP142  [1X01]  111.89,50.37 0 bottom
JP143  FIDUCIALUFIDUCIAL  [MICRO-FIDUCIAL]  102.36,69.34 0 top
JP144  FIDUCIALUFIDUCIAL  [MICRO-FIDUCIAL]  110.74,42.93 180 top
JP145  [1X12]  133.1,69.6 270 bottom
JP146  [1X12]  117.86,41.66 90 bottom
JP147  [1X02]  130.18,58.29 90 bottom
JP148  FTDI Basic  [1X06]  131.83,72.14 0 bottom
JP149  [1X01]  130.18,47.83 0 bottom
JP150  [1X01]  130.18,50.37 0 bottom
JP151  FIDUCIALUFIDUCIAL  [MICRO-FIDUCIAL]  120.65,69.34 0 top
JP152  FIDUCIALUFIDUCIAL  [MICRO-FIDUCIAL]  129.03,42.93 180 top
JP153  [1X12]  151.38,69.6 270 bottom
JP154  [1X12]  136.14,41.66 90 bottom
JP155  [1X02]  148.46,58.29 90 bottom
JP156  FTDI Basic  [1X06]  150.11,72.14 0 bottom
JP157  [1X01]  148.46,47.83 0 bottom
JP158  [1X01]  148.46,50.37 0 bottom
JP159  FIDUCIALUFIDUCIAL  [MICRO-FIDUCIAL]  138.94,69.34 0 top
JP160  FIDUCIALUFIDUCIAL  [MICRO-FIDUCIAL]  147.32,42.93 180 top
JP161  [1X12]  169.67,69.6 270 bottom
JP162  [1X12]  154.43,41.66 90 bottom
JP163  [1X02]  166.75,58.29 90 bottom
JP164  FTDI Basic  [1X06]  168.4,72.14 0 bottom
JP165  [1X01]  166.75,47.83 0 bottom
JP166  [1X01]  166.75,50.37 0 bottom
JP167  FIDUCIALUFIDUCIAL  [MICRO-FIDUCIAL]  157.23,69.34 0 top
JP168  FIDUCIALUFIDUCIAL  [MICRO-FIDUCIAL]  165.61,42.93 180 top
JP169  [1X12]  187.96,69.6 270 bottom
JP170  [1X12]  172.72,41.66 90 bottom
JP171  [1X02]  185.04,58.29 90 bottom
JP172  FTDI Basic  [1X06]  186.69,72.14 0 bottom
JP173  [1X01]  185.04,47.83 0 bottom
JP174  [1X01]  185.04,50.37 0 bottom
JP175  FIDUCIALUFIDUCIAL  [MICRO-FIDUCIAL]  175.51,69.34 0 top
JP176  FIDUCIALUFIDUCIAL  [MICRO-FIDUCIAL]  183.9,42.93 180 top
JP177  [1X12]  206.25,69.6 270 bottom
JP178  [1X12]  191.01,41.66 90 bottom
JP179  [1X02]  203.33,58.29 90 bottom
JP180  FTDI Basic  [1X06]  204.98,72.14 0 bottom
JP181  [1X01]  203.33,47.83 0 bottom
JP182  [1X01]  203.33,50.37 0 bottom
JP183  FIDUCIALUFIDUCIAL  [MICRO-FIDUCIAL]  193.8,69.34 0 top
JP184  FIDUCIALUFIDUCIAL  [MICRO-FIDUCIAL]  202.18,42.93 180 top
JP185  [1X12]  224.54,69.6 270 bottom
JP186  [1X12]  209.3,41.66 90 bottom
JP187  [1X02]  221.62,58.29 90 bottom
JP188  FTDI Basic  [1X06]  223.27,72.14 0 bottom
JP189  [1X01]  221.62,47.83 0 bottom
JP190  [1X01]  221.62,50.37 0 bottom
JP191  FIDUCIALUFIDUCIAL  [MICRO-FIDUCIAL]  212.09,69.34 0 top
JP192  FIDUCIALUFIDUCIAL  [MICRO-FIDUCIAL]  220.47,42.93 180 top
JP193  [1X12]  23.37,103.12 270 bottom
JP194  [1X12]  8.13,75.18 90 bottom
JP195  [1X02]  20.45,91.82 90 bottom
JP196  FTDI Basic  [1X06]  22.1,105.66 0 bottom
JP197  [1X01]  20.45,81.36 0 bottom
JP198  [1X01]  20.45,83.9 0 bottom
JP199  FIDUCIALUFIDUCIAL  [MICRO-FIDUCIAL]  10.92,102.87 0 top
JP200  FIDUCIALUFIDUCIAL  [MICRO-FIDUCIAL]  19.3,76.45 180 top
JP201  [1X12]  41.66,103.12 270 bottom
JP202  [1X12]  26.42,75.18 90 bottom
JP203  [1X02]  38.73,91.82 90 bottom
JP204  FTDI Basic  [1X06]  40.39,105.66 0 bottom
JP205  [1X01]  38.73,81.36 0 bottom
JP206  [1X01]  38.73,83.9 0 bottom
JP207  FIDUCIALUFIDUCIAL  [MICRO-FIDUCIAL]  29.21,102.87 0 top
JP208  FIDUCIALUFIDUCIAL  [MICRO-FIDUCIAL]  37.59,76.45 180 top
JP209  [1X12]  59.94,103.12 270 bottom
JP210  [1X12]  44.7,75.18 90 bottom
JP211  [1X02]  57.02,91.82 90 bottom
JP212  FTDI Basic  [1X06]  58.67,105.66 0 bottom
JP213  [1X01]  57.02,81.36 0 bottom
JP214  [1X01]  57.02,83.9 0 bottom
JP215  FIDUCIALUFIDUCIAL  [MICRO-FIDUCIAL]  47.5,102.87 0 top
JP216  FIDUCIALUFIDUCIAL  [MICRO-FIDUCIAL]  55.88,76.45 180 top
JP217  [1X12]  78.23,103.12 270 bottom
JP218  [1X12]  62.99,75.18 90 bottom
JP219  [1X02]  75.31,91.82 90 bottom
JP220  FTDI Basic  [1X06]  76.96,105.66 0 bottom
JP221  [1X01]  75.31,81.36 0 bottom
JP222  [1X01]  75.31,83.9 0 bottom
JP223  FIDUCIALUFIDUCIAL  [MICRO-FIDUCIAL]  65.79,102.87 0 top
JP224  FIDUCIALUFIDUCIAL  [MICRO-FIDUCIAL]  74.17,76.45 180 top
JP225  [1X12]  96.52,103.12 270 bottom
JP226  [1X12]  81.28,75.18 90 bottom
JP227  [1X02]  93.6,91.82 90 bottom
JP228  FTDI Basic  [1X06]  95.25,105.66 0 bottom
JP229  [1X01]  93.6,81.36 0 bottom
JP230  [1X01]  93.6,83.9 0 bottom
JP231  FIDUCIALUFIDUCIAL  [MICRO-FIDUCIAL]  84.07,102.87 0 top
JP232  FIDUCIALUFIDUCIAL  [MICRO-FIDUCIAL]  92.46,76.45 180 top
JP233  [1X12]  114.81,103.12 270 bottom
JP234  [1X12]  99.57,75.18 90 bottom
JP235  [1X02]  111.89,91.82 90 bottom
JP236  FTDI Basic  [1X06]  113.54,105.66 0 bottom
JP237  [1X01]  111.89,81.36 0 bottom
JP238  [1X01]  111.89,83.9 0 bottom
JP239  FIDUCIALUFIDUCIAL  [MICRO-FIDUCIAL]  102.36,102.87 0 top
JP240  FIDUCIALUFIDUCIAL  [MICRO-FIDUCIAL]  110.74,76.45 180 top
JP241  [1X12]  133.1,103.12 270 bottom
JP242  [1X12]  117.86,75.18 90 bottom
JP243  [1X02]  130.18,91.82 90 bottom
JP244  FTDI Basic  [1X06]  131.83,105.66 0 bottom
JP245  [1X01]  130.18,81.36 0 bottom
JP246  [1X01]  130.18,83.9 0 bottom
JP247  FIDUCIALUFIDUCIAL  [MICRO-FIDUCIAL]  120.65,102.87 0 top
JP248  FIDUCIALUFIDUCIAL  [MICRO-FIDUCIAL]  129.03,76.45 180 top
JP249  [1X12]  151.38,103.12 270 bottom
JP250  [1X12]  136.14,75.18 90 bottom
JP251  [1X02]  148.46,91.82 90 bottom
JP252  FTDI Basic  [1X06]  150.11,105.66 0 bottom
JP253  [1X01]  148.46,81.36 0 bottom
JP254  [1X01]  148.46,83.9 0 bottom
JP255  FIDUCIALUFIDUCIAL  [MICRO-FIDUCIAL]  138.94,102.87 0 top
JP256  FIDUCIALUFIDUCIAL  [MICRO-FIDUCIAL]  147.32,76.45 180 top
JP257  [1X12]  169.67,103.12 270 bottom
JP258  [1X12]  154.43,75.18 90 bottom
JP259  [1X02]  166.75,91.82 90 bottom
JP260  FTDI Basic  [1X06]  168.4,105.66 0 bottom
JP261  [1X01]  166.75,81.36 0 bottom
JP262  [1X01]  166.75,83.9 0 bottom
JP263  FIDUCIALUFIDUCIAL  [MICRO-FIDUCIAL]  157.23,102.87 0 top
JP264  FIDUCIALUFIDUCIAL  [MICRO-FIDUCIAL]  165.61,76.45 180 top
JP265  [1X12]  187.96,103.12 270 bottom
JP266  [1X12]  172.72,75.18 90 bottom
JP267  [1X02]  185.04,91.82 90 bottom
JP268  FTDI Basic  [1X06]  186.69,105.66 0 bottom
JP269  [1X01]  185.04,81.36 0 bottom
JP270  [1X01]  185.04,83.9 0 bottom
JP271  FIDUCIALUFIDUCIAL  [MICRO-FIDUCIAL]  175.51,102.87 0 top
JP272  FIDUCIALUFIDUCIAL  [MICRO-FIDUCIAL]  183.9,76.45 180 top
JP273  [1X12]  206.25,103.12 270 bottom
JP274  [1X12]  191.01,75.18 90 bottom
JP275  [1X02]  203.33,91.82 90 bottom
JP276  FTDI Basic  [1X06]  204.98,105.66 0 bottom
JP277  [1X01]  203.33,81.36 0 bottom
JP278  [1X01]  203.33,83.9 0 bottom
JP279  FIDUCIALUFIDUCIAL  [MICRO-FIDUCIAL]  193.8,102.87 0 top
JP280  FIDUCIALUFIDUCIAL  [MICRO-FIDUCIAL]  202.18,76.45 180 top
JP281  [1X12]  224.54,103.12 270 bottom
JP282  [1X12]  209.3,75.18 90 bottom
JP283  [1X02]  221.62,91.82 90 bottom
JP284  FTDI Basic  [1X06]  223.27,105.66 0 bottom
JP285  [1X01]  221.62,81.36 0 bottom
JP286  [1X01]  221.62,83.9 0 bottom
JP287  FIDUCIALUFIDUCIAL  [MICRO-FIDUCIAL]  212.09,102.87 0 top
JP288  FIDUCIALUFIDUCIAL  [MICRO-FIDUCIAL]  220.47,76.45 180 top
JP289  [1X12]  23.37,136.65 270 bottom
JP290  [1X12]  8.13,108.71 90 bottom
JP291  [1X02]  20.45,125.35 90 bottom
JP292  FTDI Basic  [1X06]  22.1,139.19 0 bottom
JP293  [1X01]  20.45,114.88 0 bottom
JP294  [1X01]  20.45,117.42 0 bottom
JP295  FIDUCIALUFIDUCIAL  [MICRO-FIDUCIAL]  10.92,136.4 0 top
JP296  FIDUCIALUFIDUCIAL  [MICRO-FIDUCIAL]  19.3,109.98 180 top
JP297  [1X12]  41.66,136.65 270 bottom
JP298  [1X12]  26.42,108.71 90 bottom
JP299  [1X02]  38.73,125.35 90 bottom
JP300  FTDI Basic  [1X06]  40.39,139.19 0 bottom
JP301  [1X01]  38.73,114.88 0 bottom
JP302  [1X01]  38.73,117.42 0 bottom
JP303  FIDUCIALUFIDUCIAL  [MICRO-FIDUCIAL]  29.21,136.4 0 top
JP304  FIDUCIALUFIDUCIAL  [MICRO-FIDUCIAL]  37.59,109.98 180 top
JP305  [1X12]  59.94,136.65 270 bottom
JP306  [1X12]  44.7,108.71 90 bottom
JP307  [1X02]  57.02,125.35 90 bottom
JP308  FTDI Basic  [1X06]  58.67,139.19 0 bottom
JP309  [1X01]  57.02,114.88 0 bottom
JP310  [1X01]  57.02,117.42 0 bottom
JP311  FIDUCIALUFIDUCIAL  [MICRO-FIDUCIAL]  47.5,136.4 0 top
JP312  FIDUCIALUFIDUCIAL  [MICRO-FIDUCIAL]  55.88,109.98 180 top
JP313  [1X12]  78.23,136.65 270 bottom
JP314  [1X12]  62.99,108.71 90 bottom
JP315  [1X02]  75.31,125.35 90 bottom
JP316  FTDI Basic  [1X06]  76.96,139.19 0 bottom
JP317  [1X01]  75.31,114.88 0 bottom
JP318  [1X01]  75.31,117.42 0 bottom
JP319  FIDUCIALUFIDUCIAL  [MICRO-FIDUCIAL]  65.79,136.4 0 top
JP320  FIDUCIALUFIDUCIAL  [MICRO-FIDUCIAL]  74.17,109.98 180 top
JP321  [1X12]  96.52,136.65 270 bottom
JP322  [1X12]  81.28,108.71 90 bottom
JP323  [1X02]  93.6,125.35 90 bottom
JP324  FTDI Basic  [1X06]  95.25,139.19 0 bottom
JP325  [1X01]  93.6,114.88 0 bottom
JP326  [1X01]  93.6,117.42 0 bottom
JP327  FIDUCIALUFIDUCIAL  [MICRO-FIDUCIAL]  84.07,136.4 0 top
JP328  FIDUCIALUFIDUCIAL  [MICRO-FIDUCIAL]  92.46,109.98 180 top
JP329  [1X12]  114.81,136.65 270 bottom
JP330  [1X12]  99.57,108.71 90 bottom
JP331  [1X02]  111.89,125.35 90 bottom
JP332  FTDI Basic  [1X06]  113.54,139.19 0 bottom
JP333  [1X01]  111.89,114.88 0 bottom
JP334  [1X01]  111.89,117.42 0 bottom
JP335  FIDUCIALUFIDUCIAL  [MICRO-FIDUCIAL]  102.36,136.4 0 top
JP336  FIDUCIALUFIDUCIAL  [MICRO-FIDUCIAL]  110.74,109.98 180 top
JP337  [1X12]  133.1,136.65 270 bottom
JP338  [1X12]  117.86,108.71 90 bottom
JP339  [1X02]  130.18,125.35 90 bottom
JP340  FTDI Basic  [1X06]  131.83,139.19 0 bottom
JP341  [1X01]  130.18,114.88 0 bottom
JP342  [1X01]  130.18,117.42 0 bottom
JP343  FIDUCIALUFIDUCIAL  [MICRO-FIDUCIAL]  120.65,136.4 0 top
JP344  FIDUCIALUFIDUCIAL  [MICRO-FIDUCIAL]  129.03,109.98 180 top
JP345  [1X12]  151.38,136.65 270 bottom
JP346  [1X12]  136.14,108.71 90 bottom
JP347  [1X02]  148.46,125.35 90 bottom
JP348  FTDI Basic  [1X06]  150.11,139.19 0 bottom
JP349  [1X01]  148.46,114.88 0 bottom
JP350  [1X01]  148.46,117.42 0 bottom
JP351  FIDUCIALUFIDUCIAL  [MICRO-FIDUCIAL]  138.94,136.4 0 top
JP352  FIDUCIALUFIDUCIAL  [MICRO-FIDUCIAL]  147.32,109.98 180 top
JP353  [1X12]  169.67,136.65 270 bottom
JP354  [1X12]  154.43,108.71 90 bottom
JP355  [1X02]  166.75,125.35 90 bottom
JP356  FTDI Basic  [1X06]  168.4,139.19 0 bottom
JP357  [1X01]  166.75,114.88 0 bottom
JP358  [1X01]  166.75,117.42 0 bottom
JP359  FIDUCIALUFIDUCIAL  [MICRO-FIDUCIAL]  157.23,136.4 0 top
JP360  FIDUCIALUFIDUCIAL  [MICRO-FIDUCIAL]  165.61,109.98 180 top
JP361  [1X12]  187.96,136.65 270 bottom
JP362  [1X12]  172.72,108.71 90 bottom
JP363  [1X02]  185.04,125.35 90 bottom
JP364  FTDI Basic  [1X06]  186.69,139.19 0 bottom
JP365  [1X01]  185.04,114.88 0 bottom
JP366  [1X01]  185.04,117.42 0 bottom
JP367  FIDUCIALUFIDUCIAL  [MICRO-FIDUCIAL]  175.51,136.4 0 top
JP368  FIDUCIALUFIDUCIAL  [MICRO-FIDUCIAL]  183.9,109.98 180 top
JP369  [1X12]  206.25,136.65 270 bottom
JP370  [1X12]  191.01,108.71 90 bottom
JP371  [1X02]  203.33,125.35 90 bottom
JP372  FTDI Basic  [1X06]  204.98,139.19 0 bottom
JP373  [1X01]  203.33,114.88 0 bottom
JP374  [1X01]  203.33,117.42 0 bottom
JP375  FIDUCIALUFIDUCIAL  [MICRO-FIDUCIAL]  193.8,136.4 0 top
JP376  FIDUCIALUFIDUCIAL  [MICRO-FIDUCIAL]  202.18,109.98 180 top
JP377  [1X12]  224.54,136.65 270 bottom
JP378  [1X12]  209.3,108.71 90 bottom
JP379  [1X02]  221.62,125.35 90 bottom
JP380  FTDI Basic  [1X06]  223.27,139.19 0 bottom
JP381  [1X01]  221.62,114.88 0 bottom
JP382  [1X01]  221.62,117.42 0 bottom
JP383  FIDUCIALUFIDUCIAL  [MICRO-FIDUCIAL]  212.09,136.4 0 top
JP384  FIDUCIALUFIDUCIAL  [MICRO-FIDUCIAL]  220.47,109.98 180 top
JP385  [1X12]  23.37,170.18 270 bottom
JP386  [1X12]  8.13,142.24 90 bottom
JP387  [1X02]  20.45,158.88 90 bottom
JP388  FTDI Basic  [1X06]  22.1,172.72 0 bottom
JP389  [1X01]  20.45,148.41 0 bottom
JP390  [1X01]  20.45,150.95 0 bottom
JP391  FIDUCIALUFIDUCIAL  [MICRO-FIDUCIAL]  10.92,169.93 0 top
JP392  FIDUCIALUFIDUCIAL  [MICRO-FIDUCIAL]  19.3,143.51 180 top
JP393  [1X12]  41.66,170.18 270 bottom
JP394  [1X12]  26.42,142.24 90 bottom
JP395  [1X02]  38.73,158.88 90 bottom
JP396  FTDI Basic  [1X06]  40.39,172.72 0 bottom
JP397  [1X01]  38.73,148.41 0 bottom
JP398  [1X01]  38.73,150.95 0 bottom
JP399  FIDUCIALUFIDUCIAL  [MICRO-FIDUCIAL]  29.21,169.93 0 top
JP400  FIDUCIALUFIDUCIAL  [MICRO-FIDUCIAL]  37.59,143.51 180 top
JP401  [1X12]  59.94,170.18 270 bottom
JP402  [1X12]  44.7,142.24 90 bottom
JP403  [1X02]  57.02,158.88 90 bottom
JP404  FTDI Basic  [1X06]  58.67,172.72 0 bottom
JP405  [1X01]  57.02,148.41 0 bottom
JP406  [1X01]  57.02,150.95 0 bottom
JP407  FIDUCIALUFIDUCIAL  [MICRO-FIDUCIAL]  47.5,169.93 0 top
JP408  FIDUCIALUFIDUCIAL  [MICRO-FIDUCIAL]  55.88,143.51 180 top
JP409  [1X12]  78.23,170.18 270 bottom
JP410  [1X12]  62.99,142.24 90 bottom
JP411  [1X02]  75.31,158.88 90 bottom
JP412  FTDI Basic  [1X06]  76.96,172.72 0 bottom
JP413  [1X01]  75.31,148.41 0 bottom
JP414  [1X01]  75.31,150.95 0 bottom
JP415  FIDUCIALUFIDUCIAL  [MICRO-FIDUCIAL]  65.79,169.93 0 top
JP416  FIDUCIALUFIDUCIAL  [MICRO-FIDUCIAL]  74.17,143.51 180 top
JP417  [1X12]  96.52,170.18 270 bottom
JP418  [1X12]  81.28,142.24 90 bottom
JP419  [1X02]  93.6,158.88 90 bottom
JP420  FTDI Basic  [1X06]  95.25,172.72 0 bottom
JP421  [1X01]  93.6,148.41 0 bottom
JP422  [1X01]  93.6,150.95 0 bottom
JP423  FIDUCIALUFIDUCIAL  [MICRO-FIDUCIAL]  84.07,169.93 0 top
JP424  FIDUCIALUFIDUCIAL  [MICRO-FIDUCIAL]  92.46,143.51 180 top
JP425  [1X12]  114.81,170.18 270 bottom
JP426  [1X12]  99.57,142.24 90 bottom
JP427  [1X02]  111.89,158.88 90 bottom
JP428  FTDI Basic  [1X06]  113.54,172.72 0 bottom
JP429  [1X01]  111.89,148.41 0 bottom
JP430  [1X01]  111.89,150.95 0 bottom
JP431  FIDUCIALUFIDUCIAL  [MICRO-FIDUCIAL]  102.36,169.93 0 top
JP432  FIDUCIALUFIDUCIAL  [MICRO-FIDUCIAL]  110.74,143.51 180 top
JP433  [1X12]  133.1,170.18 270 bottom
JP434  [1X12]  117.86,142.24 90 bottom
JP435  [1X02]  130.18,158.88 90 bottom
JP436  FTDI Basic  [1X06]  131.83,172.72 0 bottom
JP437  [1X01]  130.18,148.41 0 bottom
JP438  [1X01]  130.18,150.95 0 bottom
JP439  FIDUCIALUFIDUCIAL  [MICRO-FIDUCIAL]  120.65,169.93 0 top
JP440  FIDUCIALUFIDUCIAL  [MICRO-FIDUCIAL]  129.03,143.51 180 top
JP441  [1X12]  151.38,170.18 270 bottom
JP442  [1X12]  136.14,142.24 90 bottom
JP443  [1X02]  148.46,158.88 90 bottom
JP444  FTDI Basic  [1X06]  150.11,172.72 0 bottom
JP445  [1X01]  148.46,148.41 0 bottom
JP446  [1X01]  148.46,150.95 0 bottom
JP447  FIDUCIALUFIDUCIAL  [MICRO-FIDUCIAL]  138.94,169.93 0 top
JP448  FIDUCIALUFIDUCIAL  [MICRO-FIDUCIAL]  147.32,143.51 180 top
JP449  [1X12]  169.67,170.18 270 bottom
JP450  [1X12]  154.43,142.24 90 bottom
JP451  [1X02]  166.75,158.88 90 bottom
JP452  FTDI Basic  [1X06]  168.4,172.72 0 bottom
JP453  [1X01]  166.75,148.41 0 bottom
JP454  [1X01]  166.75,150.95 0 bottom
JP455  FIDUCIALUFIDUCIAL  [MICRO-FIDUCIAL]  157.23,169.93 0 top
JP456  FIDUCIALUFIDUCIAL  [MICRO-FIDUCIAL]  165.61,143.51 180 top
JP457  [1X12]  187.96,170.18 270 bottom
JP458  [1X12]  172.72,142.24 90 bottom
JP459  [1X02]  185.04,158.88 90 bottom
JP460  FTDI Basic  [1X06]  186.69,172.72 0 bottom
JP461  [1X01]  185.04,148.41 0 bottom
JP462  [1X01]  185.04,150.95 0 bottom
JP463  FIDUCIALUFIDUCIAL  [MICRO-FIDUCIAL]  175.51,169.93 0 top
JP464  FIDUCIALUFIDUCIAL  [MICRO-FIDUCIAL]  183.9,143.51 180 top
JP465  [1X12]  206.25,170.18 270 bottom
JP466  [1X12]  191.01,142.24 90 bottom
JP467  [1X02]  203.33,158.88 90 bottom
JP468  FTDI Basic  [1X06]  204.98,172.72 0 bottom
JP469  [1X01]  203.33,148.41 0 bottom
JP470  [1X01]  203.33,150.95 0 bottom
JP471  FIDUCIALUFIDUCIAL  [MICRO-FIDUCIAL]  193.8,169.93 0 top
JP472  FIDUCIALUFIDUCIAL  [MICRO-FIDUCIAL]  202.18,143.51 180 top
JP473  [1X12]  224.54,170.18 270 bottom
JP474  [1X12]  209.3,142.24 90 bottom
JP475  [1X02]  221.62,158.88 90 bottom
JP476  FTDI Basic  [1X06]  223.27,172.72 0 bottom
JP477  [1X01]  221.62,148.41 0 bottom
JP478  [1X01]  221.62,150.95 0 bottom
JP479  FIDUCIALUFIDUCIAL  [MICRO-FIDUCIAL]  212.09,169.93 0 top
JP480  FIDUCIALUFIDUCIAL  [MICRO-FIDUCIAL]  220.47,143.51 180 top
JP481  [1X12]  23.37,203.71 270 bottom
JP482  [1X12]  8.13,175.77 90 bottom
JP483  [1X02]  20.45,192.41 90 bottom
JP484  FTDI Basic  [1X06]  22.1,206.25 0 bottom
JP485  [1X01]  20.45,181.94 0 bottom
JP486  [1X01]  20.45,184.48 0 bottom
JP487  FIDUCIALUFIDUCIAL  [MICRO-FIDUCIAL]  10.92,203.45 0 top
JP488  FIDUCIALUFIDUCIAL  [MICRO-FIDUCIAL]  19.3,177.04 180 top
JP489  [1X12]  41.66,203.71 270 bottom
JP490  [1X12]  26.42,175.77 90 bottom
JP491  [1X02]  38.73,192.41 90 bottom
JP492  FTDI Basic  [1X06]  40.39,206.25 0 bottom
JP493  [1X01]  38.73,181.94 0 bottom
JP494  [1X01]  38.73,184.48 0 bottom
JP495  FIDUCIALUFIDUCIAL  [MICRO-FIDUCIAL]  29.21,203.45 0 top
JP496  FIDUCIALUFIDUCIAL  [MICRO-FIDUCIAL]  37.59,177.04 180 top
JP497  [1X12]  59.94,203.71 270 bottom
JP498  [1X12]  44.7,175.77 90 bottom
JP499  [1X02]  57.02,192.41 90 bottom
JP500  FTDI Basic  [1X06]  58.67,206.25 0 bottom
JP501  [1X01]  57.02,181.94 0 bottom
JP502  [1X01]  57.02,184.48 0 bottom
JP503  FIDUCIALUFIDUCIAL  [MICRO-FIDUCIAL]  47.5,203.45 0 top
JP504  FIDUCIALUFIDUCIAL  [MICRO-FIDUCIAL]  55.88,177.04 180 top
JP505  [1X12]  78.23,203.71 270 bottom
JP506  [1X12]  62.99,175.77 90 bottom
JP507  [1X02]  75.31,192.41 90 bottom
JP508  FTDI Basic  [1X06]  76.96,206.25 0 bottom
JP509  [1X01]  75.31,181.94 0 bottom
JP510  [1X01]  75.31,184.48 0 bottom
JP511  FIDUCIALUFIDUCIAL  [MICRO-FIDUCIAL]  65.79,203.45 0 top
JP512  FIDUCIALUFIDUCIAL  [MICRO-FIDUCIAL]  74.17,177.04 180 top
JP513  [1X12]  96.52,203.71 270 bottom
JP514  [1X12]  81.28,175.77 90 bottom
JP515  [1X02]  93.6,192.41 90 bottom
JP516  FTDI Basic  [1X06]  95.25,206.25 0 bottom
JP517  [1X01]  93.6,181.94 0 bottom
JP518  [1X01]  93.6,184.48 0 bottom
JP519  FIDUCIALUFIDUCIAL  [MICRO-FIDUCIAL]  84.07,203.45 0 top
JP520  FIDUCIALUFIDUCIAL  [MICRO-FIDUCIAL]  92.46,177.04 180 top
JP521  [1X12]  114.81,203.71 270 bottom
JP522  [1X12]  99.57,175.77 90 bottom
JP523  [1X02]  111.89,192.41 90 bottom
JP524  FTDI Basic  [1X06]  113.54,206.25 0 bottom
JP525  [1X01]  111.89,181.94 0 bottom
JP526  [1X01]  111.89,184.48 0 bottom
JP527  FIDUCIALUFIDUCIAL  [MICRO-FIDUCIAL]  102.36,203.45 0 top
JP528  FIDUCIALUFIDUCIAL  [MICRO-FIDUCIAL]  110.74,177.04 180 top
JP529  [1X12]  133.1,203.71 270 bottom
JP530  [1X12]  117.86,175.77 90 bottom
JP531  [1X02]  130.18,192.41 90 bottom
JP532  FTDI Basic  [1X06]  131.83,206.25 0 bottom
JP533  [1X01]  130.18,181.94 0 bottom
JP534  [1X01]  130.18,184.48 0 bottom
JP535  FIDUCIALUFIDUCIAL  [MICRO-FIDUCIAL]  120.65,203.45 0 top
JP536  FIDUCIALUFIDUCIAL  [MICRO-FIDUCIAL]  129.03,177.04 180 top
JP537  [1X12]  151.38,203.71 270 bottom
JP538  [1X12]  136.14,175.77 90 bottom
JP539  [1X02]  148.46,192.41 90 bottom
JP540  FTDI Basic  [1X06]  150.11,206.25 0 bottom
JP541  [1X01]  148.46,181.94 0 bottom
JP542  [1X01]  148.46,184.48 0 bottom
JP543  FIDUCIALUFIDUCIAL  [MICRO-FIDUCIAL]  138.94,203.45 0 top
JP544  FIDUCIALUFIDUCIAL  [MICRO-FIDUCIAL]  147.32,177.04 180 top
JP545  [1X12]  169.67,203.71 270 bottom
JP546  [1X12]  154.43,175.77 90 bottom
JP547  [1X02]  166.75,192.41 90 bottom
JP548  FTDI Basic  [1X06]  168.4,206.25 0 bottom
JP549  [1X01]  166.75,181.94 0 bottom
JP550  [1X01]  166.75,184.48 0 bottom
JP551  FIDUCIALUFIDUCIAL  [MICRO-FIDUCIAL]  157.23,203.45 0 top
JP552  FIDUCIALUFIDUCIAL  [MICRO-FIDUCIAL]  165.61,177.04 180 top
JP553  [1X12]  187.96,203.71 270 bottom